# Altium PCB ECE453.PcbDoc
Units mm, origin at the board's own origin, x right, y up, seen from the top; angles counter-clockwise.
Board outline 95 x 95 mm, 2 copper layers (Top Layer, Bottom Layer); 37 components, 20 nets, 108 pads, 56 vias.
Unrouted connection lines stored in the file: 41.
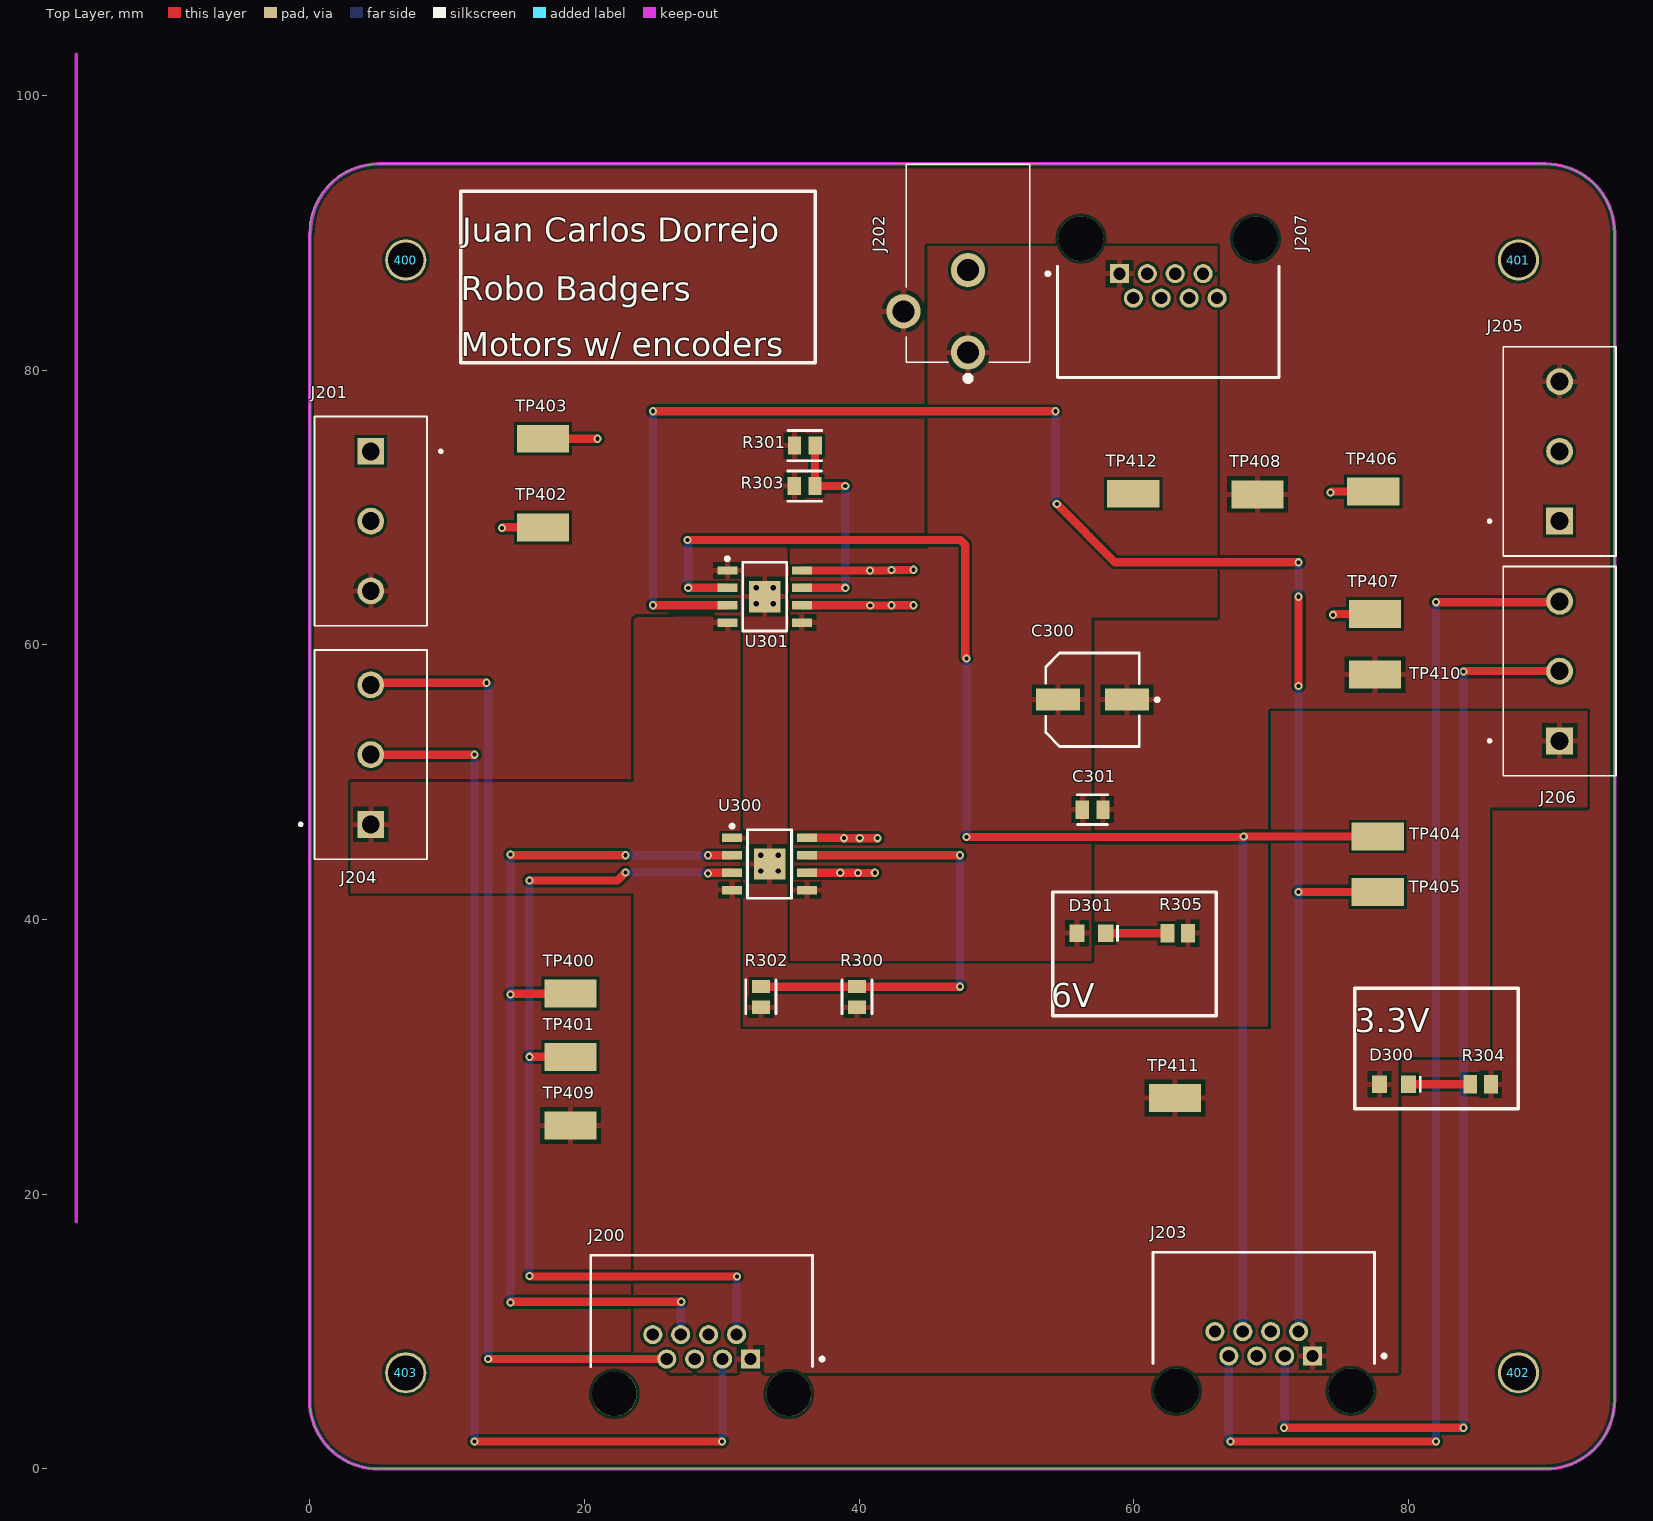
[diagram p0: Top Layer view]
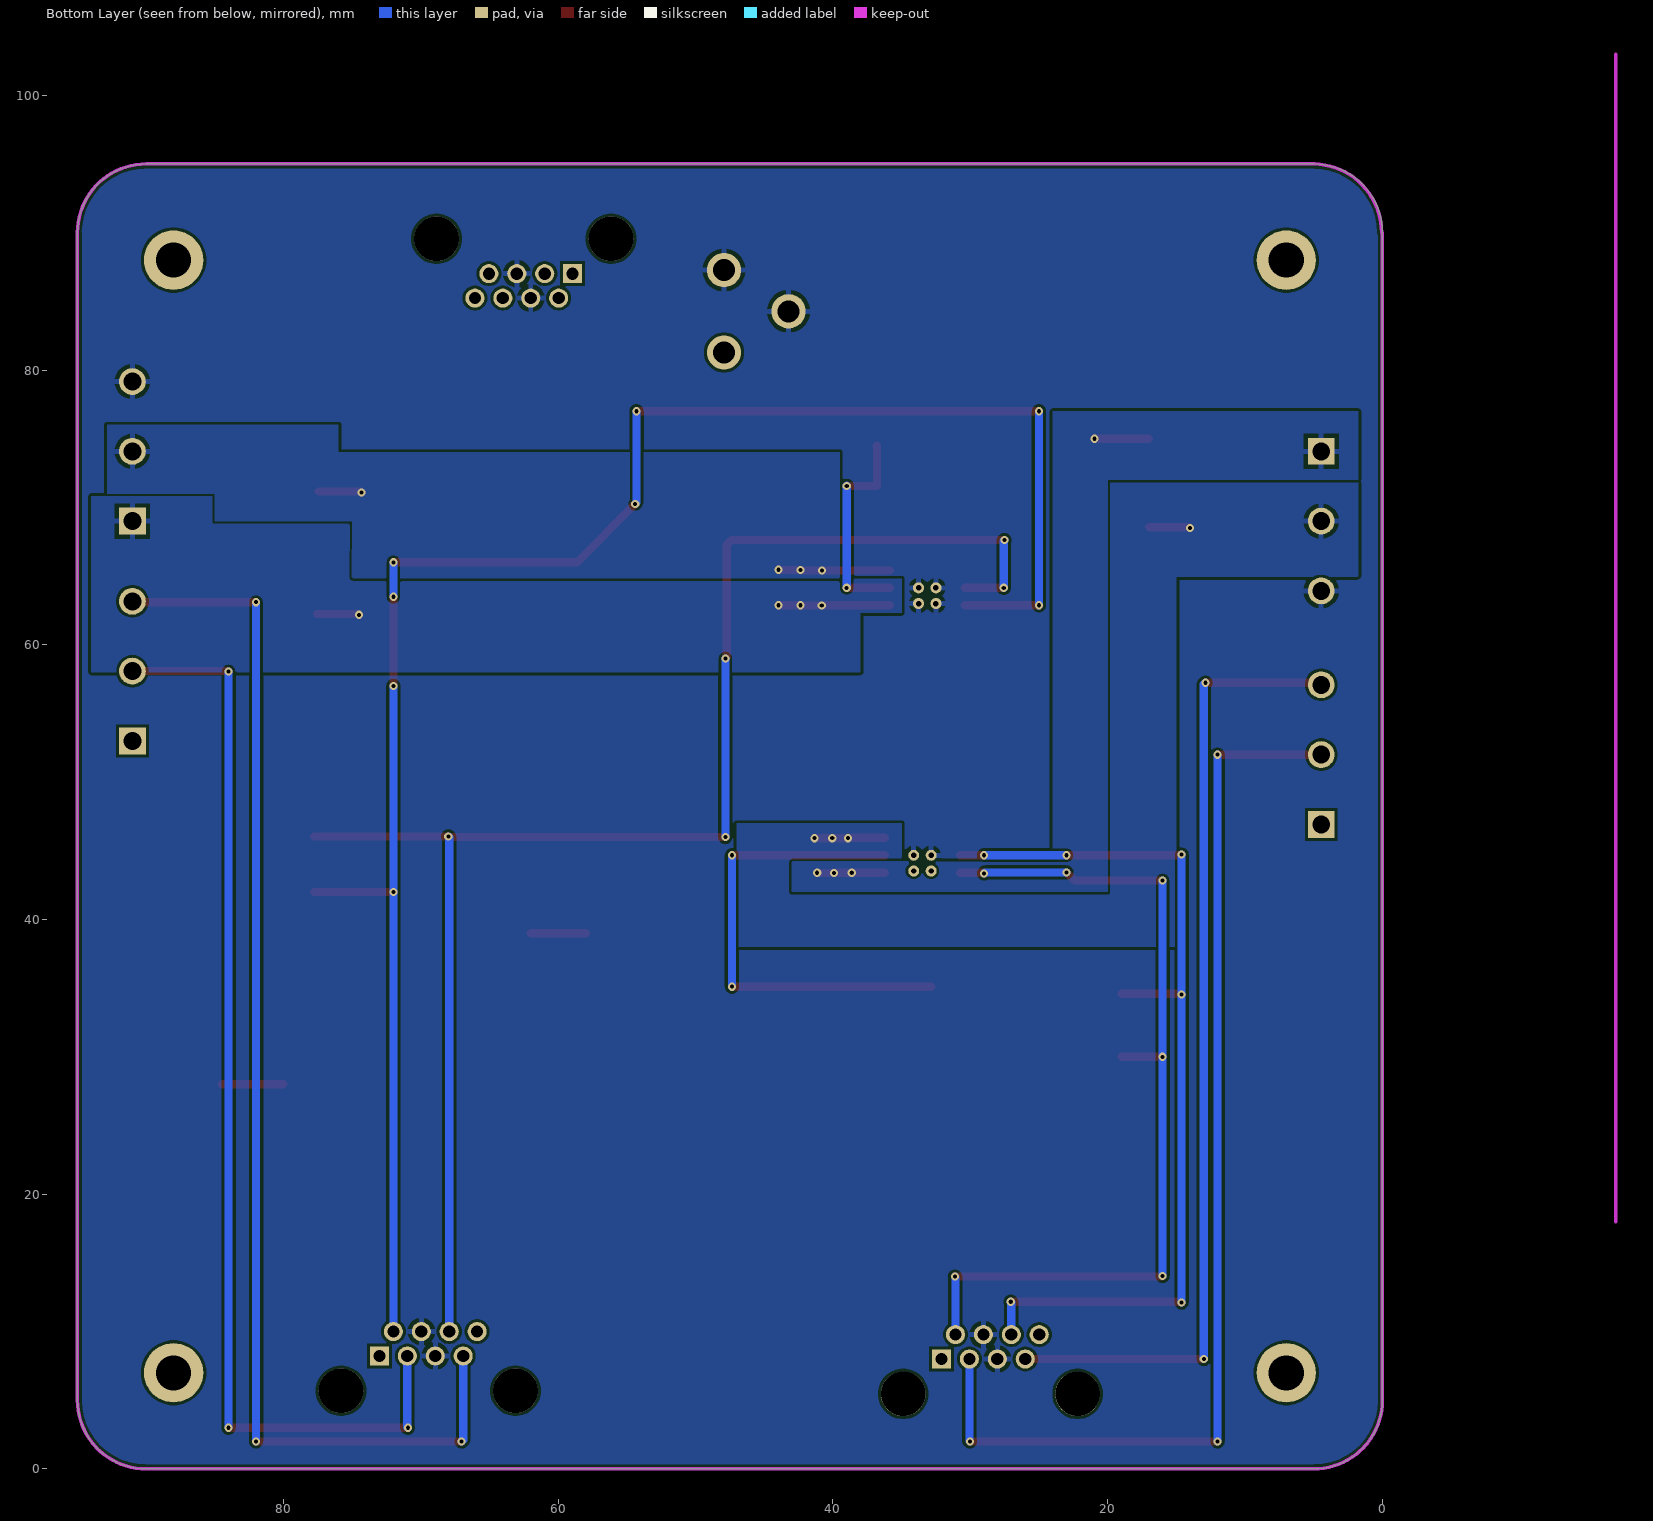
[diagram p1: Bottom Layer view, seen from below]
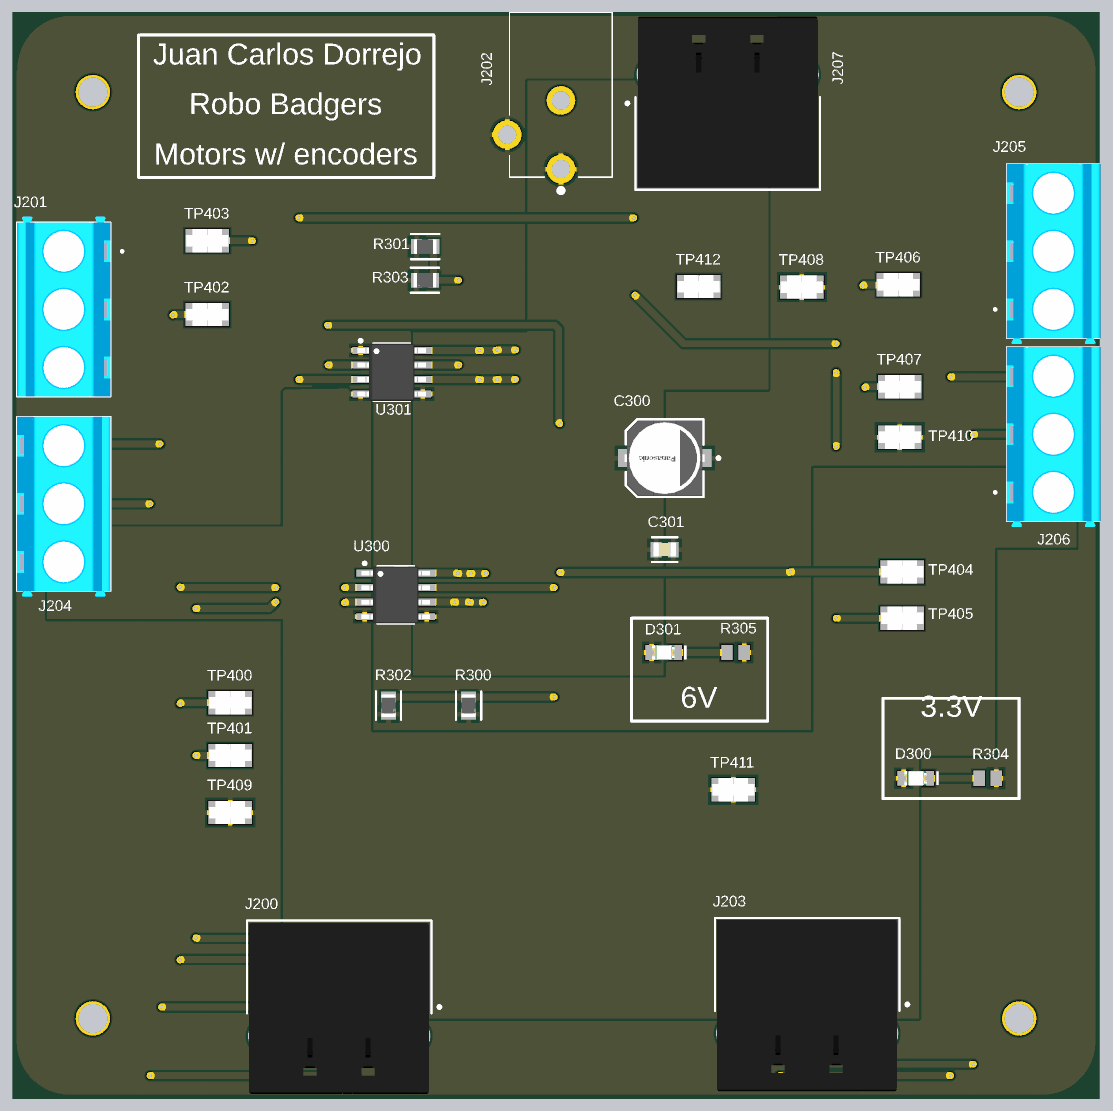
[diagram p2: 3D render of the assembled board from above, using the file's embedded part models]

## Layer stack, top to bottom
Top Solder: solder mask 0.0102, Solder Resist, Dk 3.5
Top Layer: signal copper 0.0356
Dielectric1: dielectric 0.32, FR-4, Dk 4.8
Bottom Layer: signal copper 0.0356
Bottom Solder: solder mask 0.0102, Solder Resist, Dk 3.5

## Board outline
0,5 ccw(c5,5) 5,0 90,0 ccw(c90,5) 95,5 95,90 ccw(c90,90) 90,95 5,95 ccw(c5,90) 0,90

## Design rules (kind name [scope] priority, off if disabled: settings)
Clearance Polygon_Clearance [All vs InPolygon] p1: gap=0.2 ignorepadtopadclearanceinfootprint=FALSE
Clearance [All] p2: gap=0.2 ignorepadtopadclearanceinfootprint=TRUE
ComponentClearance [InComponent('U3')] p1: gap=0 collisioncheckmode=3 verticalgap=0.254 showdistances=FALSE
Height [All] p1: minheight=0 maxheight=75 prefheight=12.7
HoleSize [All] p1: absolutevalues=TRUE maxlimit=6.35 minlimit=0.3 maxpercent=80.000 minpercent=20.000
MinimumAnnularRing [All] p1: minimumring=0.15
MinimumSolderMaskSliver [All] p1: minsoldermaskwidth=0.22
NetAntennae NetAntennae_5.0V [InNet('5.0V')] p1: netantennaetolerance=0
NetAntennae NetAntennae_3.3V [InNet('3.3V')] p2: netantennaetolerance=0
PlaneClearance [All] p1: clearance=0.3
PlaneConnect [All] p1: planeconnectstyle=Relief reliefexpansion=0.3 reliefentries=4 reliefconductorwidth=0.3 reliefairgap=0.3
PolygonConnect ViaConnect [All vs IsVia] p1: connectstyle=Direct reliefconductorwidth=0.381 reliefentries=4 polygonreliefangle="90 Angle" airgapwidth=0.254
PolygonConnect [All] p2: connectstyle=Relief reliefconductorwidth=0.4 reliefentries=4 polygonreliefangle="90 Angle" airgapwidth=0.3
RoutingVias [All] p1: holewidth=0.3 width=0.6 viastyle="Through Hole" minholewidth=0.3 minwidth=0.6 maxholewidth=5 maxwidth=10
SilkToSilkClearance [All] p1: silktosilkclearance=0
SilkToSolderMaskClearance [IsPad] p1: minsilkscreentomaskgap=0 clearancetoexposedcopper=TRUE
SolderMaskExpansion [All] p1: expansion=0.102 istentingtop=FALSE
UnConnectedPin [All] p1:
Width [All] p1: maxlimit=10 minlimit=0.2 preferedwidth=0.6
21 further rules are at their usual default settings.

## Classes and differential pairs
component class 04_Mechanical: TP400 TP401 TP402 TP403 TP404 TP405 TP406 TP407 TP408 TP409 TP410 TP411 TP412 U1

## Components (designator, comment, footprint, x,y, rotation, side; value= is the part's Value field where it differs from the comment)
400 "MHOLE_2_55MM" MHOLE_2_55MM 7,88 r90 top
401 "MHOLE_2_55MM" MHOLE_2_55MM 88,88 r90 top
402 "MHOLE_2_55MM" MHOLE_2_55MM 88,7 r90 top
403 "MHOLE_2_55MM" MHOLE_2_55MM 7,7 r90 top
C300 "100uF" FP-SD8-MFG 57,56 r180 top
C301 "10uF" FP-C0805C-DG-MFG 57,48 r0 top
D300 "150080GS75000" WL-SMCW_0805_150080xx75000 78.95,28 r180 top
D301 "150080GS75000" WL-SMCW_0805_150080xx75000 56.91,39 r180 top
J200 "RJHSE-5080" FP-RJHSE-5080-MFG 28.54,7.873 r0 top
J201 "CONN_TB006-508-03BE" CUI_TB006-508-03BE 4.456,74.08 r270 top
J202 "PJ-102AH" CUI_PJ-102AH 47.931,87.774 r90 top
J203 "RJHSE-5080" FP-RJHSE-5080-MFG 69.46,8.095 r0 top
J204 "CONN_TB006-508-03BE" CUI_TB006-508-03BE 4.456,46.92 r90 top
J205 "CONN_TB006-508-03BE" CUI_TB006-508-03BE 91,69 r90 top
J206 "CONN_TB006-508-03BE" CUI_TB006-508-03BE 91,53 r90 top
J207 "RJHSE-5080" FP-RJHSE-5080-MFG 62.508,87.139 r180 top
R300 "200mR" FP-CSR0805-IPC_C 39.85,34.359 r270 top
R301 "200mR" FP-CSR0805-IPC_C 36.06,74.49 r180 top
R302 "200mR" FP-CSR0805-IPC_C 32.85,34.359 r270 top
R303 "200mR" FP-CSR0805-IPC_C 36.036,71.551 r180 top
R304 "330R" RESC2013X60X40LL20T25 85.25,28 r0 top
R305 "330R" RESC2013X60X40LL20T25 63.2,39 r0 top
TP400 "5019" KSTN-5019_V 19,34.6 r180 top
TP401 "5019" KSTN-5019_V 19,30 r180 top
TP402 "5019" KSTN-5019_V 17,68.546 r180 top
TP403 "5019" KSTN-5019_V 17,75 r180 top
TP404 "5019" KSTN-5019_V 77.763,46.049 r180 top
TP405 "5019" KSTN-5019_V 77.763,42 r180 top
TP406 "5019" KSTN-5019_V 77.44,71.149 r180 top
TP407 "5019" KSTN-5019_V 77.557,62.237 r180 top
TP408 "5019" KSTN-5019_V 69,70.949 r0 top
TP409 "5019" KSTN-5019_V 19,25 r180 top
TP410 "5019" KSTN-5019_V 77.557,57.82 r180 top
TP411 "5019" KSTN-5019_V 63,27 r180 top
TP412 "5019" KSTN-5019_V 59.968,70.992 r0 top
U300 "IC_DRV8251DDAR" SOIC_8_PP 33.485,44.037 r0 top
U301 "IC_DRV8251DDAR" SOIC_8_PP 33.135,63.508 r0 top

## Footprints (in the part's own frame and the unit in brackets; to place one, negate y for a bottom-side part, rotate by r counter-clockwise, add the part's x,y. Pads: shape width x height; smd on the part's side, far side on the other; paste and mask are expansions set on the pad)
CUI_PJ-102AH [mm]
  round 2.5 hole 1.6: 1(-6.5,0) 2(-0.5,0) 3(-3.5,4.7)
  silkscreen extent -8.58,-4.5 7.2,4.5
CUI_TB006-508-03BE [mm]
  rect 1.95x1.95 / inner round 1.95 / far side rect 1.95x1.95 hole 1.3: 1(0,0)
  round 1.95 hole 1.3: 2(5.08,0) 3(10.16,0)
  silkscreen extent -2.54,-4.1 12.7,5.2, body extent -3.04,-4.1 12.7,4.1, height 10
FP-C0805C-DG-MFG [mm]
  rect 0.95x1.35 smd paste+0 mask+0: 1(-0.75,0) 2(0.75,0)
  silkscreen extent -1.11,-1.08 1.1,1.07, body extent -1.4,-0.85 1.4,0.85, height 0.25
FP-CSR0805-IPC_C [mm]
  rect 0.956x1.308 smd paste+0 mask+0: 1(-0.751,0) 2(0.751,0)
  silkscreen extent -1.23,-1.1 1.23,1.1, body extent -1.33,-0.8 1.33,0.8, height 0.25
FP-RJHSE-5080-MFG [mm]
  rect 1.39x1.39 hole 0.89 paste-1000 mask+0: 1(3.556,0.127)
  round 1.39 hole 0.89 paste-1000 mask+0: 2(2.54,1.905) 3(1.524,0.127) 4(0.508,1.905) 5(-0.508,0.127) 6(-1.524,1.905) 7(-2.54,0.127) 8(-3.556,1.905)
  round 3.25 hole 3.25 unplated paste-1000 mask+0: ""(-6.35,-2.413) ""(6.35,-2.413)
  silkscreen extent -8.06,-0.41 8.89,7.68, body extent -8.16,-7.78 8.16,7.78, height 0.25
FP-SD8-MFG [mm]
  rect 3.2x1.6 smd paste+0 mask+0: 1(-2.5,0) 2(2.5,0)
  silkscreen extent -4.83,-3.4 3.4,3.4, body extent -4.35,-3.65 4.35,3.65, height 0.25
KSTN-5019_V [mm] "Test Point, 1-Leads, Body 3.81x2.03mm"
  rect 3.8x2.03 smd: 1(0,0)
  body extent -1.9,-1.01 1.9,1.02, height 2.29
MHOLE_2_55MM [mm]
  round 3 / inner round 4.572 / far side round 4.318 hole 2.55: 1(0,0)
RESC2013X60X40LL20T25 [mm] "Chip Resistor, 2-Leads, Body 2.00x1.25mm, IPC High Density"
  rect 1x1.35 smd: 1(-0.75,0) 2(0.75,0)
  body extent -1.1,-0.72 1.1,0.72, height 0.6
SOIC_8_PP [mm] "SOIC, 8-Leads, Body 4.90x3.90mm, Pitch 1.27mm, Thermal Pad 2.29x2.29mm, IPC Medium Density"
  rect 1.45x0.6 smd: 1(-2.725,1.905) 2(-2.725,0.635) 3(-2.725,-0.635) 4(-2.725,-1.905) 5(2.725,-1.905) 6(2.725,-0.635) 7(2.725,0.635) 8(2.725,1.905)
  round 0.8 hole 0.4: 9(-0.635,-0.508) 9(-0.635,0.635) 9(0.635,-0.508) 9(0.635,0.635)
  rect 2.29x2.29 smd: 9(0,0)
  silkscreen extent -2.85,-2.5 1.6,2.88, body extent -3,-2.5 3,2.5, height 1.7
WL-SMCW_0805_150080xx75000 [mm] "SMD Mono-color Chip LED, body 2.0x1.25mm"
  rect 1.1x1.3 smd: 1(-1.05,0) 2(1.05,0)
  silkscreen extent -2,-0.6 -1.8,0.6, body extent -1,-0.63 1,0.62, height 0.7

## Part data
400 401 402 403: "Mounting Holde", Manufacturer Part Number="UW MTHOLE"
C300: library part CMP-05427-000061-1, "CAP ALUM 100UF 20% 25V SMD", Case/Package=Radial, Leakage Current=3uA, Manufacturer=Panasonic, Manufacturer Part Number=EEE-1EA101XP, Max Operating Temperature=85°C, Min Operating Temperature=-40°C, Package Quantity=900, Ratings=AEC-Q200, Ripple Current=143mA, Supplier Part Number=PCE3898CT-ND, Tolerance=20%, Voltage=25V, Capacitance=100uF, Category="Aluminum Electrolytic Capacitors", ComponentLink1Description=https://datasheet.ciiva.com/30108/11aba0000ce2-30108047.pdf?src-supplier=Onlinecomponents.com, ComponentLink1URL=https://datasheet.ciiva.com/30108/11aba0000ce2-30108047.pdf?src-supplier=Onlinecomponents.com, ComponentLink2Description=https://datasheet.ciiva.com/16201/aba0000ce2-16201065.pdf?src-supplier=Future+Electronics, ComponentLink2URL=https://datasheet.ciiva.com/16201/aba0000ce2-16201065.pdf?src-supplier=Future+Electronics, ComponentLink3Description=https://datasheet.ciiva.com/24022/aba0000ce2-40801-24022875.pdf?src-supplier=Mouser, ComponentLink3URL=https://datasheet.ciiva.com/24022/aba0000ce2-40801-24022875.pdf?src-supplier=Mouser, Construction=Cylindrical, Contact Plating=Tin, Diameter=6.3mm, Dissipation Factor=14%, Height=7.7mm, Height - Seated (Max)=0.303inch, Lead Free="Lead Free", Length=8mm, Life (Hours)=2000Hour, Mount="Surface Mount", Mounting Technology="Surface Mount,PCB", Packaging="Tape and Reel", Polarity=Polar, Pricing="1=0.51, 10=0.338, 50=0.2488, 100=0.2025 (USD)", Radiation Hardening=No, Reach SVHC Compliant=Unknown, Ripple Current (AC)=143mA, RoHS=Yes, RoHS Compliant=Yes, Series=S, Stock=37921, Supplier=Digikey, Termination=SMD/SMT, Voltage Rating=25V, Voltage Rating (DC)=25V
C301: library part CMP-2007-03243-2, "CAP CER 10UF 10V X5R 0805", 3DS Part Number=220-00001, Case Code (Imperial)=0805, Case Code (Metric)=2012, Dielectric=X5R, Dielectric Material=Ceramic, Manufacturer=Kemet, Manufacturer Part Number=C0805C106K8PACTU, Max Operating Temperature=85°C, Min Operating Temperature=-55°C, Package=C0805C-DG, Package Quantity=1, Supplier Part Number=399-C0805C106K8PAC7800CT-ND, Temperature="-55°C to +85°C", Temperature Coefficient=15%, Temperature Range High=+85°C, Tolerance=10%, Voltage=10V, Automotive=No, Capacitance=10uF, Case/Package=0805, Category=Cap, ComponentLink1Description=https://datasheet.ciiva.com/7842/1732709-7842198.pdf?src-supplier=Element14, ComponentLink1URL=https://datasheet.ciiva.com/7842/1732709-7842198.pdf?src-supplier=Element14, ComponentLink2Description=Datasheet, ComponentLink2URL=https://content.kemet.com/datasheets/KEM_C1006_X5R_SMD.pdf, ComponentLink3Description=https://datasheet.ciiva.com/22704/1732709-22704859.pdf?src-supplier=Element14, ComponentLink3URL=https://datasheet.ciiva.com/22704/1732709-22704859.pdf?src-supplier=Element14, ComponentLink4Description=https://datasheet.ciiva.com/7842/40889-7842552.pdf?src-supplier=Element14, ComponentLink4URL=https://datasheet.ciiva.com/7842/40889-7842552.pdf?src-supplier=Element14, Construction=Flat, Contact Plating=Tin,Matte, Depth=1.25mm, Device Class L1="Passive Components", Device Class L2=Capacitors, Device Class L3="Ceramic Capacitors", Digikey Description="CAP CER 10UF 10V X5R 0805", Dissipation Factor=10%, Height=1.4mm, Ipc Land Pattern Name=CAPC200125X125, Lead Free=Yes, Length=2mm, Material=Ceramic, Mounting Technology="Surface Mount", Mouser Description="CAP CER 10UF 10V X5R 0805", Octopart=https://octopart.com/c0805c106k8pactu-kemet-98697, Packaging="Tape and Reel", Pins=2, Pricing="1=0.14, 10=0.098, 50=0.0584, 100=0.0459, 500=0.03388, 1000=0.02805 (USD)", Radiation Hardening=No, Reach SVHC Compliant=No, RoHS=TRUE, RoHS Compliant=Yes, Series=C, Stock=5930250, Supplier=Digikey, Temperature Characteristic=X5R, Temperature Range Low=-55°C, Termination=SMD/SMT, Thickness=0.055inch, Voltage Rating=10V, Voltage Rating (DC)=10V, Width=0.049inch
D300 D301: library part CMP-1426-00007-2, Case Code (Imperial)=0805, Case Code (Metric)=2012, Color=Green, Forward Current=100mA, Forward Voltage=3.2V, Max Junction Temperature (Tj)=95°C, Max Operating Temperature=85°C, Max Reverse Voltage (DC)=5V, Min Operating Temperature=-40°C, Power Dissipation=105mW, Test Current=20mA, Case/Package=0805, Dominant Wavelength=525nm, Height=700µm, Length=2mm, Lens Style="Clear, Rectangular", Luminous Intensity=450mcd, Mount="Surface Mount", NexarPartId=29717780, Packaging="Tape and Reel", Peak Wavelength=515nm, REACH SVHC=Unknown, Reverse Voltage=5V, RoHS=Compliant, Viewing Angle=140°, Wavelength=520nm, Width=1.25mm
J200 J203 J207: library part CMP-02366-000003-1, "CONN MOD JACK 8P8C R/A UNSHLD", Current Rating=1.5A, Manufacturer=Amphenol, Package=CONN_MOD_JACK, Temperature="-55°C to +85°C", Temperature Range High=+85°C, Temperature Range Low=-55°C, Voltage Rating=125V, Automotive=No, Category=Conn, ComponentLink2Description=Datasheet, ComponentLink2URL=https://cdn.amphenol-icc.com/media/wysiwyg/files/documentation/datasheet/inputoutput/io-modjack-rjhse.pdf, Conn Gender=Female, Conn Orientation="Right Angle", Contact Material=Gold,Nickel, Device Class L1=Connectors, Device Class L2="Modular / Ethernet Connectors", Device Class L3=unset, Digikey Description="CONN MOD JACK 8P8C R/A UNSHLD", Footprint Url=https://cdn.amphenol-icc.com/media/wysiwyg/files/drawing/rjhse5080.pdf?__cf_chl_jschl_tk__=e349db0bbbb6188a39347cd5e541b92fa02c9719-1587748343-0-AW7tChdeHzRPLX9gSWj7WrKaXQoY9BsmT9Ek0h-T62M9y3Rs9iypFcOtkzb-6sGYQEjFE-jcoNciDETCOZrh1rYyOesac5SvYLoLwHIsHvF4AKBlx-MXmfZUVk9OTTJLqyQq2qMm0PFRLJpNcK0nrKResqOniRSYixG2sPTmOPraH-ULJFBDL602CHqcI9KKBgTq90Jh1OL2Td4moJ99rFsJRJ1Tk_uoxGe8ublcP_ARu-uLpWcQrBcwOcHDTAwL29DAwVaqcH7ta8Ks7WMlHmVl_pILeEDwT0bE9vu5Pa5S3PtNRF1leuFkgi_FMbUxTDulc5xzbXSfng8srUIV1lWXny5nx1fZJEUa_w97yKjffzBMxiWLWVN-V7-uqAaPbyv_m-wRyw5O25OZNyJOeGU, Height=0.535inch, Is Female=yes, Lead Free=Yes, Manufacturer Part Number=RJHSE-5080, Mouser Description="Modular Connectors / Ethernet Connectors R/A RJ45 NONSHIELDED 8 CONT NO LEDS", Number of Contacts=8, Octopart=https://octopart.com/rjhse-5080-amphenol-45060, Pitch=1.02mm, RoHS=TRUE
J201 J204 J205 J206: "2~24 Poles, Screw Type, Horizontal, 5.08 Pitch, 26~14 (AWG), Terminal Block Connector", Package=None, Availability="In Stock", Check_prices=https://www.snapeda.com/parts/TB006-508-03BE/CUI+Devices/view-part/?ref=eda, CUI_purchase_URL=https://www.cuidevices.com/product/interconnect/connectors/terminal-blocks/tb006-508-series?utm_source=snapeda.com&utm_medium=referral&utm_campaign=snapedaBOM, MF="CUI Devices", MP=TB006-508-03BE, Price=None, Purchase-URL=https://pricing.snapeda.com/search/part/TB006-508-03BE/?ref=eda, SnapEDA_Link=https://www.snapeda.com/parts/TB006-508-03BE/CUI+Devices/view-part/?ref=snap
J202: library part CONN_PJ-102AH, "2.0 x 6.5 mm, 5.0 A, Horizontal, Through Hole, Tapered Pins, Dc Power Jack Connector", Manufacturer=CUI, Package=None, Supplier Part Number=CP-102AH-ND, Availability=Unavailable, Category=Uncategorized, ComponentLink1Description=http://www.mouser.com/ds/2/670/PJ-102AH-524179.pdf?src-supplier=Mouser, ComponentLink1URL=http://www.mouser.com/ds/2/670/PJ-102AH-524179.pdf?src-supplier=Mouser, ComponentLink2Description=https://www.cui.com/product/resource/digikeypdf/pj-102ah.pdf?src-supplier=Digikey, ComponentLink2URL=https://www.cui.com/product/resource/digikeypdf/pj-102ah.pdf?src-supplier=Digikey, ComponentLink3Description=http://www.cui.com/Product/Resource/FuturePDF/PJ-102AH.pdf?src-supplier=Future+Electronics, ComponentLink3URL=http://www.cui.com/Product/Resource/FuturePDF/PJ-102AH.pdf?src-supplier=Future+Electronics, Connector Type=Jack, Diameter=2.1mm, Lead Free="Lead Free", Manufacturer Part Number=PJ-102AH, MF="{'manufacturer': u'CUI Devices'}", MP=PJ-102AH, Number of Conductors=2, Orientation=Horizontal, Packaging=Bulk, Price=None, Pricing="1=0.700000, 10=0.590000, 25=0.566000, 40=0.553750, 200=0.529750, 400=0.481600, 600=0.433430, 1000=0.385280, 2400=0.349160 (USD)", RoHS=Yes, RoHS Compliant=Yes, Shielding=Unshielded, Stock=76168, Supplier=Digikey, Termination="Through Hole"
R300 R301 R302 R303: library part CMP-26527-002513-1, "General Purpose Thick Film Chip Resistor, 0805, 0.2Ω, 1%, 200ppm/°C, 0.25W", Case Code (Imperial)=0805, Case Code (Metric)=2012, Manufacturer="Stackpole Electronics", Manufacturer Part Number=CSR0805FKR200, Max Operating Temperature=155°C, Max Power Dissipation=250mW, Min Operating Temperature=-55°C, Resistor Type="Thick Film", Supplier Part Number=CSR0805FKR200CT-ND, Temperature Coefficient=200ppm/°C, Tolerance=1%, Case/Package=0805, Category="Chip SMD Resistors", ComponentLink1Description=https://www.seielect.com/catalog/SEI-Packaging.pdf?src-supplier=Digikey, ComponentLink1URL=https://www.seielect.com/catalog/SEI-Packaging.pdf?src-supplier=Digikey, ComponentLink2Description=https://www.seielect.com/catalog/sei-csr_csrn.pdf?src-supplier=Digikey, ComponentLink2URL=https://www.seielect.com/catalog/sei-csr_csrn.pdf?src-supplier=Digikey, Height=0.026inch, Length=0.079inch, Mount="Surface Mount", Mounting Technology="Surface Mount", Number of Terminations=2, Packaging="Tape and Reel", Pricing="1=0.36, 10=0.265, 25=0.212, 50=0.1576, 100=0.1111, 250=0.09896, 500=0.08484 (USD)", Resistance=200mR, RoHS=Yes, RoHS Compliant=Yes, Series=CSR, Stock=21013, Supplier=Digikey, Width=0.049inch
R304 R305: library part CMP-2001-00628-1, Case Code (Imperial)=0805, Case Code (Metric)=2012, Manufacturer=Panasonic, Manufacturer Part Number=ERA-6AEB331V, Max Operating Temperature=155°C, Max Power Dissipation=125mW, Min Operating Temperature=-55°C, Package Quantity=1, Part Number=ERA6AEB331V, Ratings=AEC-Q200, Resistance Tolerance=0.1%, Resistor Type="Thin Film,Metal Film", Supplier Part Number=P330DACT-ND, Temperature Coefficient=25ppm/°C, Voltage Rating=100V, Case/Package=0805, Category="Chip SMD Resistors", ComponentLink1Description=https://datasheet.ciiva.com/11808/0900766b80eb1d8c-11808093.pdf?src-supplier=Rs, ComponentLink1URL=https://datasheet.ciiva.com/11808/0900766b80eb1d8c-11808093.pdf?src-supplier=Rs, ComponentLink2Description=https://datasheet.ciiva.com/29184/452857-da-01-en-widerstand-0805-era-29184079.pdf?src-supplier=Conrad, ComponentLink2URL=https://datasheet.ciiva.com/29184/452857-da-01-en-widerstand-0805-era-29184079.pdf?src-supplier=Conrad, ComponentLink3Description=https://datasheet.ciiva.com/9182/aoa0000ce26-9182968.pdf?src-supplier=Avnet, ComponentLink3URL=https://datasheet.ciiva.com/9182/aoa0000ce26-9182968.pdf?src-supplier=Avnet, ComponentLink4Description=https://datasheet.ciiva.com/48536/era-eng-tds-48536857.pdf?src-supplier=Distrelec, ComponentLink4URL=https://datasheet.ciiva.com/48536/era-eng-tds-48536857.pdf?src-supplier=Distrelec, ComponentLink5Description=https://datasheet.ciiva.com/22759/485442-22759176.pdf?src-supplier=Farnell, ComponentLink5URL=https://datasheet.ciiva.com/22759/485442-22759176.pdf?src-supplier=Farnell, ComponentLink6Description=https://datasheet.ciiva.com/6138/485442-6138589.pdf?src-supplier=Farnell, ComponentLink6URL=https://datasheet.ciiva.com/6138/485442-6138589.pdf?src-supplier=Farnell, ComponentLink7Description=https://datasheet.ciiva.com/43457/485442-43457816.pdf?src-supplier=Farnell, ComponentLink7URL=https://datasheet.ciiva.com/43457/485442-43457816.pdf?src-supplier=Farnell, ComponentLink8Description=https://datasheet.ciiva.com/6138/485442-6138585.pdf?src-supplier=Farnell, ComponentLink8URL=https://datasheet.ciiva.com/6138/485442-6138585.pdf?src-supplier=Farnell, ComponentLink9Description=https://datasheet.ciiva.com/24164/aoa0000ce26-197354-24164407.pdf?src-supplier=Mouser, ComponentLink9URL=https://datasheet.ciiva.com/24164/aoa0000ce26-197354-24164407.pdf?src-supplier=Mouser, ComponentLink10Description=https://datasheet.ciiva.com/22744/1776116-22744153.pdf?src-supplier=Element14, ComponentLink10URL=https://datasheet.ciiva.com/22744/1776116-22744153.pdf?src-supplier=Element14, Contact Plating=Tin, Depth=1.25mm, Features="Automotive AEC-Q200", Height=0.5mm, Lead Free="Lead Free", Length=2mm, Mounting Technology="Surface Mount", Number of Terminations=2, Packaging="Tape and Reel", Pins=2, Power Rating=125mW, Pricing="1=0.13, 10=0.095, 50=0.0748, 100=0.067, 500=0.05106, 1000=0.04511 (USD)", Reach SVHC Compliant=No, RoHS=Yes, RoHS Compliant=Yes, Series=ERA, Stock=18932, Supplier=Digikey, Technology="METAL FILM", Termination=SMD/SMT, Tolerance=0.1%, Voltage Rating (DC)=100V, Weight=0.000194oz, Width=1.25mm
TP400 TP401 TP402 TP403 TP404 TP405 TP406 TP407 TP408 TP409 TP410 TP411 TP412: library part CMP-1672-00008-1, "Test Point, 1 Position SMD, RoHS, Tape and Reel", Package Quantity=1000, Supplier Part Number=36-5019DKR-ND, ComponentLink1Description="Manufacturer URL", ComponentLink1URL=http://www.keyelco.com/, ComponentLink2Description=Datasheet, ComponentLink2URL=http://www.keyelco.com/product-pdf.cfm?p=1357, Contact Plating=Silver, DatasheetVersion=03/2014, Mount="Surface Mount", Mounting Technology="Surface Mount", PackageDescription="1-Pin Surface Mount Device, Body 3.81 x 2.03 mm", PackageReference=5019, Packaging="Tape and Reel", Pins=1, RoHSCompliant=True, Supplier=Digikey
U300 U301: "48-V, 3.5-A H bridge motor driver with current regulation and latched OCP 8-SO PowerPAD -40 to 150", Manufacturer="Texas Instruments", Manufacturer Part Number=DRV8251DDAR, Supplier Part Number=296-DRV8251DDARCT-ND, Category="Integrated Circuits (ICs)", Pricing="1=1.66, 10=1.495, 25=1.4108, 100=1.202, 250=1.12868, 500=0.9876, 1000=0.81829 (USD)", RoHS=No, Stock=4730, Supplier=Digi-Key

## Via types
v1: diameter 0.6, hole 0.3, Top Layer to Bottom Layer, 56 vias

## Nets (pads, with @x,y where several pads share a name; then routed paths per layer and width w, separated by ;. In a path a pad name is that pad's centre, name@x,y a point inside that pad or via, vN(x,y) a via of type N, cw(c..) or ccw(c..) an arc to the next point about the centre after c; other vN are vias at no path point)
3.3V: D300.2 J200.1 J203.1 J204.1 J206.1 TP411.1 U300.4 U301.4
6V: C300.2 C301.1 D301.2 J202.1 J207.1 U300.5 U301.5
12V: TP412.1
GND: C300.1 C301.2 J200.4 J200.5 J201.3 J202.2 J202.3 J203.4 J203.5 J205.3 J207.4 J207.5 R300.2 R301.2 R302.2 R303.2 R304.2 R305.2 TP408.1 TP409.1 TP410.1 U300.1 U300.9 U301.1 U301.9
L_ISENS: R300.1 R302.1 U300.7 | length 35.2
  Top Layer w0.6: R302.1 v1(47.35,35.11) ; U300.7 v1(47.35,44.672)
  Bottom Layer w0.6: v1(47.35,35.11) v1(47.35,44.672)
LAPhase: J200.3 J204.2 | length 81.6
  Top Layer w0.6: J204.2 v1(12,52) ; v1(12,2) v1(30.025,2)
  Bottom Layer w0.6: v1(12,2) v1(12,52) ; v1(30.025,2) 30.064,2.039 J200.3
LBPhase: J200.7 J204.3 | length 70.8
  Top Layer w0.6: J204.3 4.611,57.235 v1(12.881,57.235) ; v1(13,8) J200.7
  Bottom Layer w0.6: v1(12.881,57.235) 13,57.116 v1(13,8)
LOUT1: J201.1 TP403.1 U300.6 | length 8.9
  Top Layer w0.6: TP403.1 v1(20.961,75) ; U300.6 v1(38.628,43.402) 39.907,43.402 v1(39.921,43.388) 41.137,43.388 v1(41.15,43.402)
LOUT2: J201.2 TP402.1 U300.8 | length 8.2
  Top Layer w0.6: v1(14,68.508) 14.039,68.546 TP402.1 ; U300.8 38.875,45.942 v1(38.9,45.917) v1(41.35,45.917)
  other v1: 40.05,45.917
LPWM1: J200.2 TP401.1 U300.3 | length 66.2
  Top Layer w0.6: v1(16,14.049) 16.049,14 v1(31.121,14) ; v1(16,30) TP401.1 ; v1(16,42.842) 22.419,42.842 v1(23,43.424) ; v1(29,43.352) 29.049,43.402 U300.3
  Bottom Layer w0.6: v1(16,14.049) v1(16,30) v1(16,42.842) ; v1(23,43.424) 28.928,43.424 v1(29,43.352) ; J200.2 31.08,13.959 v1(31.121,14)
LPWM2: J200.6 TP400.1 U300.2 | length 68
  Top Layer w0.6: v1(14.617,12.113) 14.666,12.162 27.051,12.162 v1(27.055,12.167) ; v1(14.617,34.53) 14.687,34.6 TP400.1 ; v1(14.617,44.721) 14.666,44.672 v1(23,44.672) ; v1(29,44.672) U300.2
  Bottom Layer w0.6: v1(14.617,12.113) v1(14.617,34.53) v1(14.617,44.721) ; v1(23,44.672) v1(29,44.672) ; J200.6 27.016,12.127 v1(27.055,12.167)
PWR_12R: D301.1 R305.1 | length 4
  Top Layer w0.6: D301.1@58,39 R305.1@62,39
PWR_R: D300.1 R304.1 | length 4.5
  Top Layer w0.6: D300.1 R304.1
R_ISENS: R301.1 R303.1 U301.7 | length 15.7
  Top Layer w0.6: U301.7 v1(39,64.143) ; R301.1 36.799,74.478 36.799,71.563 R303.1 v1(38.997,71.551)
  Bottom Layer w0.6: v1(39,64.143) v1@39,71.573
RAPhase: J203.3 J206.2 | length 80.4
  Top Layer w0.6: v1(70.945,3) v1(84,3) ; v1(83.995,58.057) 84.019,58.08 J206.2
  Bottom Layer w0.6: v1(70.945,3) 70.984,3.039 J203.3 ; v1(83.995,58.057) 84,58.052 v1(84,3)
RBPhase: J203.7 J206.3 | length 91.4
  Top Layer w0.6: v1(67.033,2) v1(82,2) ; v1(82,63.102) 90.942,63.102 J206.3
  Bottom Layer w0.6: J203.7 66.92,2.113 v1(67.033,2) ; v1(82,2) v1(82,63.102)
ROUT1: J205.1 TP407.1 U301.6 | length 11.2
  Top Layer w0.6: U301.6 40.797,62.873 v1(40.817,62.853) 42.339,62.853 v1(42.359,62.873) v1(43.968,62.873) ; v1(74.5,62.175) 74.562,62.237 TP407.1
ROUT2: J205.2 TP406.1 U301.8 | length 11.3
  Top Layer w0.6: U301.8 v1(40.8,65.413) 42.323,65.413 v1(42.359,65.449) 43.958,65.449 v1(43.968,65.46) ; v1(74.328,71.082) 74.396,71.149 TP406.1
RPWM1: J203.2 TP405.1 U301.3 | length 136.8
  Top Layer w0.6: v1(25,62.873) U301.3 ; v1(25,77) v1(54.3,77) ; v1(54.399,70.249) 58.648,66 v1(72,66) ; v1(72,42) TP405.1 ; v1(72,57) v1(72,63.49)
  Bottom Layer w0.6: v1(25,62.873) v1(25,77) ; v1(54.3,77) 54.3,70.348 v1(54.399,70.249) ; J203.2 v1(72,42) v1(72,57) ; v1(72,63.49) v1(72,66)
RPWM2: J203.6 TP404.1 U301.2 | length 114
  Top Layer w0.6: v1(27.518,67.619) 47.387,67.619 47.738,67.268 47.738,59.085 v1(47.823,59) ; v1(27.567,64.143) U301.2 ; v1(47.831,46) 67.951,46 v1(68,46.049) TP404.1
  Bottom Layer w0.6: v1(27.518,67.619) 27.567,67.57 v1(27.567,64.143) ; v1(47.823,59) 47.831,58.992 v1(47.831,46) ; J203.6 67.936,45.985 v1(68,46.049)
pads on no net: 400.1 401.1 402.1 403.1 J200. J200.8 J203. J203.8 J207. J207.2 J207.3 J207.6 J207.7 J207.8

## Polygon pours and split planes (outlines as drawn)
6V on Top Layer "T_6V" (solid, remove dead copper, pour order 20): 35,37 56.91,37 56.91,62 66.064,62 66.064,77 66.064,83.766 66.064,89 57.022,89 45,89 45,77 45,67 35,67
GND on Top Layer "T_GND" (solid, remove dead copper, pour order 22): 95,95 95,0 0,0 0,95
3.3V on Top Layer "T_3V3" (solid, remove dead copper, pour order 3): 85.9,48.068 86,48.168 93,48.168 93,55.147 70,55.147 70,50.175 70,32 31.435,32 31.335,32.1 31.335,62.103 23.8,62 23.608,61.808 23.608,50 3,50 3,41.918 23.608,41.918 23.608,7 79.25,7 79.25,30 85.9,30
GND on Bottom Layer "T_GND" (solid, remove dead copper, pour order 14): 0,95 95,95 95,0 0,0
ROUT1 on Bottom Layer "B_ROUT1" (solid, remove dead copper, pour order 5): 35,64.795 75.075,64.992 75,69 85.204,69 85.204,70.812 94,70.812 94,58 93,58 38,58 38,62.329 35,62.329
ROUT2 on Bottom Layer "B_ROUT2" (solid, remove dead copper, pour order 1): 39.51,64.814 75.023,64.836 74.983,69 85,69 85,71 92.843,71 92.843,76 76,76 76,74 39.51,74
LOUT2 on Bottom Layer "B_LOUT2" (solid, remove dead copper, pour order 13): 35,47 35,44.414 35.179,44.236 43.188,44.236 43.188,42.188 43,42 20,42 20,71.796 19.796,72 1.762,72 1.762,65 1.823,64.939 15,64.939 15,38 47,38 47,46.99 46.99,47
LOUT1 on Bottom Layer "B_LOUT1" (solid, remove dead copper, pour order 11): 43,44.248 43,42 20,42 20,72 1.762,72 1.762,77 24,77 24,44.201

## Keep-outs
Keep-Out Layer:
  lines w0.254: -17,18 -17,103 ; 0,90 0,5 ccw(c5,5) 5,0 90,0 ccw(c90,5) 95,5 95,90 ccw(c90,90) 90,95 5,95 ; 0.064,90 cw(c5.066,90) 4.94,95

## Silkscreen, mask and mechanical layers (free items; w line width, h text height)
Top Overlay:
  lines w0.254: 11,80.54 36.811,80.54 36.811,93 11,93 11,80.54 ; 54.105,33 66.012,33 66.012,42 54.105,42 54.105,33 ; 76.093,26.219 88,26.219 88,35 76.093,35 76.093,26.219
  text "Juan Carlos Dorrejo" at 11.123,88.742 h3
  text "Robo Badgers" at 10.994,84.505 h3 r359.86
  text "Motors w/ encoders" at 11,80.435 h3
  text "6V" at 54,33.011 h3
  text "3.3V" at 76.075,31.222 h3
Mechanical 2:
  lines w0.254: -17,18 -17,103 ; 0,5 ccw(c5,5) 5,0 ; 5,95 90,95 ; 5,0 ccw(c5,90) 95,90 ; 5,0 5,0 ; 95,90 95,90

## Dimensions
90,0 to 90,95 on Mechanical 1
-17,18 to 95,90 on Mechanical 1